# Altium PCB FluxCapacitor.pcbdoc
Units mil, origin at the board's own origin, x right, y up, seen from the top; angles counter-clockwise.
Board outline 985 x 1270 mil, 2 copper layers (Top Layer, Bottom Layer); 30 components, 21 nets, 70 pads, 21 vias.
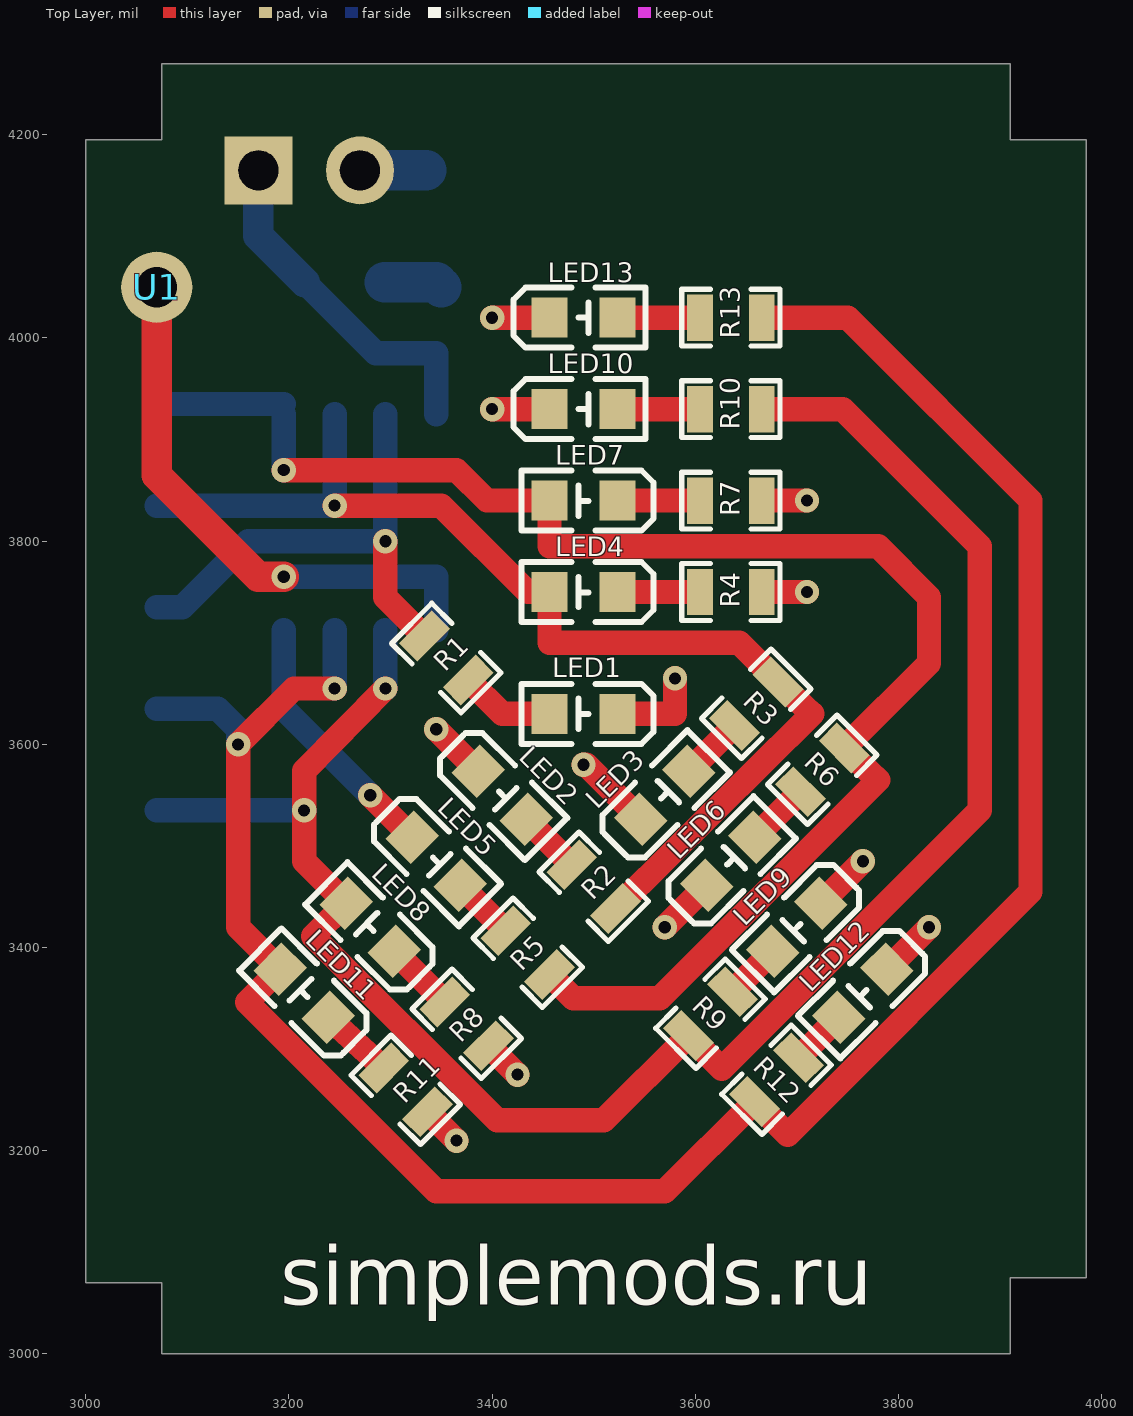
[diagram p0: Top Layer view]
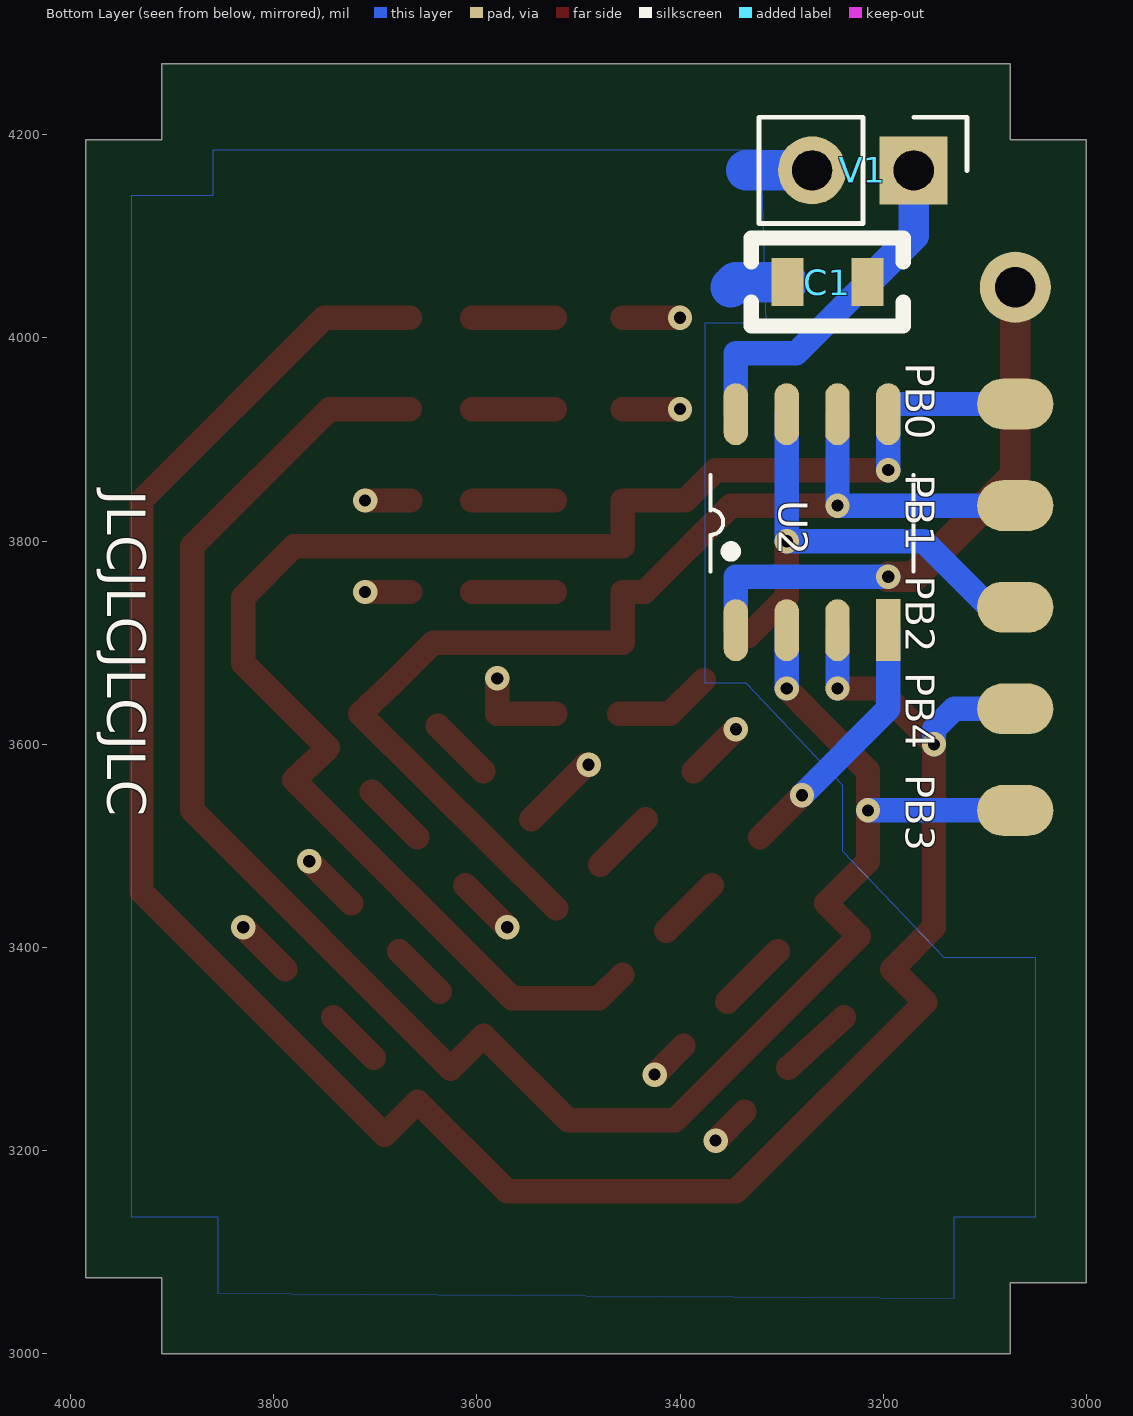
[diagram p1: Bottom Layer view, seen from below]

## Layer stack, top to bottom
Top Solder: solder mask 0.4, Solder Resist, Dk 3.5
Top Layer: signal copper 1.4
Dielectric 1: dielectric 12.6, FR-4, Dk 4.8
Bottom Layer: signal copper 1.4
Bottom Solder: solder mask 0.4, Solder Resist, Dk 3.5

## Board outline
3075,4195 3000,4195 3000,3070 3075,3070 3075,3000 3910,3000 3910,3075 3985,3075 3985,4195 3910,4195 3910,4270 3075,4270

## Design rules (kind name [scope] priority, off if disabled: settings)
AssemblyTestPointUsage [All] p0: scope1count=1 scope1_0_kind=Board scope1_0_value=Board scope2count=1 scope2_0_kind=Board scope2_0_value=Board commentlength=0
AssemblyTestpoint [All] p0: scope1count=1 scope1_0_kind=Board scope1_0_value=Board scope2count=1 scope2_0_kind=Board scope2_0_value=Board commentlength=0
Clearance [All] p0: scope1count=1 scope1_0_kind=Board scope1_0_value=Board scope2count=1 scope2_0_kind=Board scope2_0_value=Board commentlength=0 gap=10
Clearance [All] p1: gap=10 ignorepadtopadclearanceinfootprint=FALSE except(0: Arc-Hole Track-Hole SMDPad-Hole THPad-Hole Via-Hole Fill-Hole Poly-Hole Region-Hole Text-Hole)
ComponentClearance [All] p0: scope1count=1 scope1_0_kind=Board scope1_0_value=Board scope2count=1 scope2_0_kind=Board scope2_0_value=Board commentlength=0 gap=10 collisioncheckmode=3
DiffPairsRouting [All] p0: scope1count=1 scope1_0_kind=Board scope1_0_value=Board scope2count=1 scope2_0_kind=Board scope2_0_value=Board commentlength=0
FabricationTestPointUsage [All] p0: scope1count=1 scope1_0_kind=Board scope1_0_value=Board scope2count=1 scope2_0_kind=Board scope2_0_value=Board commentlength=0 valid=0 allowmultiple=FALSE
FabricationTestpoint [All] p0: scope1count=1 scope1_0_kind=Board scope1_0_value=Board scope2count=1 scope2_0_kind=Board scope2_0_value=Board commentlength=0 side=3 testpointundercomponent=TRUE minsize=40 maxsize=100 preferedsize=60 minholesize=0 maxholesize=40 preferedholesize=32 testpointgrid=1
FanoutControl Fanout_BGA [All] p0 off: scope1count=1 scope1_0_kind=Board scope1_0_value=Board scope2count=1 scope2_0_kind=Board scope2_0_value=Board commentlength=69 // Protel DXP Scope 1 Expression Was: IsBGA   Fanout_BGA (Default Rule)
FanoutControl Fanout_LCC [All] p0 off: scope1count=1 scope1_0_kind=Board scope1_0_value=Board scope2count=1 scope2_0_kind=Board scope2_0_value=Board commentlength=69 // Protel DXP Scope 1 Expression Was: IsLCC   Fanout_LCC (Default Rule)
FanoutControl Fanout_SOIC [All] p0 off: scope1count=1 scope1_0_kind=Board scope1_0_value=Board scope2count=1 scope2_0_kind=Board scope2_0_value=Board commentlength=71 // Protel DXP Scope 1 Expression Was: IsSOIC   Fanout_SOIC (Default Rule)
FanoutControl Fanout_Small [All] p0 off: scope1count=1 scope1_0_kind=Board scope1_0_value=Board scope2count=1 scope2_0_kind=Board scope2_0_value=Board commentlength=84 // Protel DXP Scope 1 Expression Was: (CompPinCount < 5)   Fanout_Small (Default Rule)
FanoutControl Fanout_Default [All] p0: scope1count=1 scope1_0_kind=Board scope1_0_value=Board scope2count=1 scope2_0_kind=Board scope2_0_value=Board commentlength=30 // Fanout_Default (Default Rule)
Height [All] p0: scope1count=1 scope1_0_kind=Board scope1_0_value=Board scope2count=1 scope2_0_kind=Board scope2_0_value=Board commentlength=0
HoleSize [All] p0: scope1count=1 scope1_0_kind=Board scope1_0_value=Board scope2count=1 scope2_0_kind=Board scope2_0_value=Board commentlength=0 absolutevalues=TRUE maxlimit=100 minlimit=1 maxpercent=80.000 minpercent=20.000
HoleToHoleClearance [All] p0: scope1count=1 scope1_0_kind=Board scope1_0_value=Board scope2count=1 scope2_0_kind=Board scope2_0_value=Board commentlength=0
LayerPairs [All] p0: scope1count=1 scope1_0_kind=Board scope1_0_value=Board scope2count=1 scope2_0_kind=Board scope2_0_value=Board commentlength=0 enforce=TRUE
MinimumSolderMaskSliver [All] p0: scope1count=1 scope1_0_kind=Board scope1_0_value=Board scope2count=1 scope2_0_kind=Board scope2_0_value=Board commentlength=0
NetAntennae [All] p0: scope1count=1 scope1_0_kind=Board scope1_0_value=Board scope2count=1 scope2_0_kind=Board scope2_0_value=Board commentlength=0
PasteMaskExpansion [All] p0: scope1count=1 scope1_0_kind=Board scope1_0_value=Board scope2count=1 scope2_0_kind=Board scope2_0_value=Board commentlength=0 expansion=0
PlaneClearance [All] p0: scope1count=1 scope1_0_kind=Board scope1_0_value=Board scope2count=1 scope2_0_kind=Board scope2_0_value=Board commentlength=0 clearance=20
PlaneConnect [All] p0: scope1count=1 scope1_0_kind=Board scope1_0_value=Board scope2count=1 scope2_0_kind=Board scope2_0_value=Board commentlength=0 planeconnectstyle=Relief reliefexpansion=20 reliefentries=4 reliefconductorwidth=10 reliefairgap=10
PolygonConnect [All] p0: scope1count=1 scope1_0_kind=Board scope1_0_value=Board scope2count=1 scope2_0_kind=Board scope2_0_value=Board commentlength=0 connectstyle=Relief reliefconductorwidth=10 reliefentries=4 polygonreliefangle="90 Angle"
PolygonConnect [All] p1: connectstyle=Relief reliefconductorwidth=10 reliefentries=4 polygonreliefangle="90 Angle" airgapwidth=10
RoutingCorners [All] p0: scope1count=1 scope1_0_kind=Board scope1_0_value=Board scope2count=1 scope2_0_kind=Board scope2_0_value=Board commentlength=0 cornerstyle=45-Degree minsetback=100 maxsetback=100
RoutingLayers [All] p0: scope1count=1 scope1_0_kind=Board scope1_0_value=Board scope2count=1 scope2_0_kind=Board scope2_0_value=Board commentlength=0 top layer=Automatic bottom layer=Automatic
RoutingPriority [All] p0: scope1count=1 scope1_0_kind=Board scope1_0_value=Board scope2count=1 scope2_0_kind=Board scope2_0_value=Board commentlength=0
RoutingTopology [All] p0: scope1count=1 scope1_0_kind=Board scope1_0_value=Board scope2count=1 scope2_0_kind=Board scope2_0_value=Board commentlength=0 topology=Shortest
RoutingVias [All] p0: scope1count=1 scope1_0_kind=Board scope1_0_value=Board scope2count=1 scope2_0_kind=Board scope2_0_value=Board commentlength=0 holewidth=28 width=50 viastyle="Through Hole" minholewidth=28 minwidth=50 maxholewidth=28 maxwidth=50
RoutingVias [All] p1: holewidth=28 width=50 viastyle="Through Hole" minholewidth=28 minwidth=50 maxholewidth=28 maxwidth=50
ShortCircuit [All] p0: scope1count=1 scope1_0_kind=Board scope1_0_value=Board scope2count=1 scope2_0_kind=Board scope2_0_value=Board commentlength=0 allowed=FALSE
SilkToBoardRegionClearance [All] p0: scope1count=1 scope1_0_kind=Board scope1_0_value=Board scope2count=1 scope2_0_kind=Board scope2_0_value=Board commentlength=0
SilkToSilkClearance [All] p0: scope1count=1 scope1_0_kind=Board scope1_0_value=Board scope2count=1 scope2_0_kind=Board scope2_0_value=Board commentlength=0
SilkToSolderMaskClearance [All] p0 off: scope1count=1 scope1_0_kind=Board scope1_0_value=Board scope2count=1 scope2_0_kind=Board scope2_0_value=Board commentlength=44 // Protel DXP Scope 1 Expression Was: IsPad
SolderMaskExpansion [All] p0: scope1count=1 scope1_0_kind=Board scope1_0_value=Board scope2count=1 scope2_0_kind=Board scope2_0_value=Board commentlength=0 expansion=4
SolderMaskExpansion [All] p1: expansion=4 istentingtop=FALSE
UnRoutedNet [All] p0: scope1count=1 scope1_0_kind=Board scope1_0_value=Board scope2count=1 scope2_0_kind=Board scope2_0_value=Board commentlength=0
UnpouredPolygon [All] p0: scope1count=1 scope1_0_kind=Board scope1_0_value=Board scope2count=1 scope2_0_kind=Board scope2_0_value=Board commentlength=0
Width [All] p0: scope1count=1 scope1_0_kind=Board scope1_0_value=Board scope2count=1 scope2_0_kind=Board scope2_0_value=Board commentlength=0 maxlimit=10 minlimit=10 preferedwidth=10
Width [All] p1: maxlimit=10 minlimit=10 preferedwidth=10
30 further rules are at their usual default settings.

## Components (designator, comment, footprint, x,y, rotation, side; value= is the part's Value field where it differs from the comment)
C1 "150u" fe09dbbba525426883dd2f75b8a5dadf 3255,4055 r0 bottom
LED1 "204-10SURD/S530-A3" LED0603-FD 3490,3630 r0 top
LED2 "204-10SURD/S530-A3" c88aef745d464b878583123803bd6a02 3410,3550 r135 top
LED3 "204-10SURD/S530-A3" c88aef745d464b878583123803bd6a02 3570,3550 r225 top
LED4 "204-10SURD/S530-A3" LED0603-FD 3490,3750 r0 top
LED5 "204-10SURD/S530-A3" c88aef745d464b878583123803bd6a02 3345,3485 r135 top
LED6 "204-10SURD/S530-A3" c88aef745d464b878583123803bd6a02 3635,3485 r225 top
LED7 "204-10SURD/S530-A3" LED0603-FD 3490,3840 r0 top
LED8 "204-10SURD/S530-A3" c88aef745d464b878583123803bd6a02 3280,3420 r315 top
LED9 "204-10SURD/S530-A3" c88aef745d464b878583123803bd6a02 3700,3420 r45 top
LED10 "204-10SURD/S530-A3" c88aef745d464b878583123803bd6a02 3490,3930 r180 top
LED11 "204-10SURD/S530-A3" c88aef745d464b878583123803bd6a02 3215,3355 r315 top
LED12 "204-10SURD/S530-A3" c88aef745d464b878583123803bd6a02 3765,3355 r45 top
LED13 "204-10SURD/S530-A3" c88aef745d464b878583123803bd6a02 3490,4020 r180 top
R1 "220" 9b25a176a8c64f669440bb485681adbd 3355,3685 r315 top
R2 "220" 9b25a176a8c64f669440bb485681adbd 3500,3460 r315 top
R3 "220" 9b25a176a8c64f669440bb485681adbd 3660,3640 r225 top
R4 "220" SM0603_RESISTOR 3635,3750 r0 top
R5 "220" 9b25a176a8c64f669440bb485681adbd 3435,3395 r135 top
R6 "220" 9b25a176a8c64f669440bb485681adbd 3725,3575 r225 top
R7 "220" SM0603_RESISTOR 3635,3840 r0 top
R8 "220" 9b25a176a8c64f669440bb485681adbd 3375,3325 r315 top
R9 "220" 9b25a176a8c64f669440bb485681adbd 3615,3335 r45 top
R10 "220" SM0603_RESISTOR 3635,3930 r0 top
R11 "220" 9b25a176a8c64f669440bb485681adbd 3315,3260 r315 top
R12 "220" 9b25a176a8c64f669440bb485681adbd 3680,3270 r45 top
R13 "220" SM0603_RESISTOR 3635,4020 r0 top
U1 "1X01-CLEANBIG" 1X01-CLEANBIG 3070,4050 r0 top
U2 "ATtiny13A" 5a076db198c24afdb4a9b3188ef892e5 3270,3820 r180 bottom
V1 "Voltage_Source_VDC" 24ec65ffa466416b8291d859e8b2e801 3170,4165 r90 bottom

## Footprints (in the part's own frame and the unit in brackets; to place one, negate y for a bottom-side part, rotate by r counter-clockwise, add the part's x,y. Pads: shape width x height; smd on the part's side, far side on the other; paste and mask are expansions set on the pad)
1X01-CLEANBIG [mil]
  round 70 hole 40 mask+0: 1(0,0)
5a076db198c24afdb4a9b3188ef892e5 [mil]
  oval 24x61 smd mask+0: 2(-25,-107.6) 3(25,-107.6) 5(75,105) 6(25,105) 7(-25,105) 8(-75,105) PB_5(-75,-107.6)
  rect 24x61 smd mask+0: 4(75,-107.6)
  silkscreen extent -100,-50 100,45
9b25a176a8c64f669440bb485681adbd [mil]
  rect 25.4x45.7 smd mask+0: 1(-30.5,0) 2(30.5,0)
  silkscreen extent -48,-28 48,28
24ec65ffa466416b8291d859e8b2e801 [mil]
  rect 66.93x66.93 hole 39.36 mask+0: 1(0,0)
  round 66.93 hole 39.36 mask+0: 2(0,100)
  silkscreen extent -52,-52 52,152
c88aef745d464b878583123803bd6a02 [mm]
  rect 0.9x1 smd mask+0: 1(-0.85,0) 2(0.85,0)
  silkscreen extent -1.55,-0.75 1.75,0.75
fe09dbbba525426883dd2f75b8a5dadf [mil]
  rect 31.5x47.2 smd mask+0: 1(-39.4,0) 2(39.4,0)
  silkscreen extent -75,-43 75,43
LED0603-FD [mm]
  rect 0.9x1 smd mask+0: 1(-0.85,0) 2(0.85,0)
  silkscreen extent -1.55,-0.75 1.75,0.75
SM0603_RESISTOR [mil]
  rect 25.4x45.7 smd mask+0: 1(-30.5,0) 2(30.5,0)
  silkscreen extent -48,-28 48,28

## Free pads (board coordinates)
  oval 75x50 smd far side mask+0: 1(3070,3935) 2(3070,3835) 3(3070,3735) 5(3070,3535) 5(3070,3635)

## Via types
v1: diameter 24, hole 12, Top Layer to Bottom Layer, 21 vias

## Nets (pads, with @x,y where several pads share a name; then routed paths per layer and width w, separated by ;. In a path a pad name is that pad's centre, name@x,y a point inside that pad or via, vN(x,y) a via of type N, cw(c..) or ccw(c..) an arc to the next point about the centre after c; other vN are vias at no path point)
GND: C1.2 LED1.2 LED2.2 LED3.2 LED5.2 LED6.2 LED9.2 LED10.2 LED12.2 LED13.2 R4.2 R7.2 R8.2 R11.2 U2.4 V1.2 | length 1065.6
  Top Layer w24: v1(3280,3550) LED5.2 ; R11.2 v1(3365,3210) ; v1(3345,3615) LED2.2 ; R8.2 v1(3425,3275) ; v1(3400,3930) LED10.2 ; v1(3400,4020) LED13.2 ; v1(3490,3580) 3492.67,3580 LED3.2 ; LED1.2@3523,3630 3580,3630 v1(3580,3665) ; v1(3570,3420) LED6.2 ; R4.2 v1(3710,3750) ; R7.2 v1(3710,3840) ; LED9.2 v1(3765,3485) ; LED12.2 v1(3830,3420)
  Bottom Layer w24: U2.4 3195,3635 v1(3280,3550)
  Bottom Layer w40: V1.2 3335,4165 ; C1.2 3345,4055 3350,4050
LED2_1:  | length 63.2
  Top Layer w24: 3433.7,3526.3 3478.4,3481.6
LED3_1: R3.2 | length 63.3
  Top Layer w24: 3593.66,3573.66 R3.2
LED4_2: LED4.2 | length 81
  Top Layer w24: LED4.2 3604.5,3750
LED5_1: R5.2 | length 63.3
  Top Layer w24: 3368.7,3461.3 R5.2
LED6_1: R6.2 | length 63.3
  Top Layer w24: 3658.66,3508.66 R6.2
LED7_2: LED7.2 | length 81
  Top Layer w24: LED7.2 3604.5,3840
LED8_2: LED8.2 | length 70.4
  Top Layer w24: LED8.2 3353.44,3346.57
LED9_1: R9.2 | length 56.2
  Top Layer w24: R9.2 3676.34,3396.34
LED10_1:  | length 81
  Top Layer w24: 3523.46,3930 3604.5,3930
LED11_2: LED11.2 | length 74
  Top Layer w24: LED11.2 3293.4,3281.6
LED12_1: R12.2 | length 56.2
  Top Layer w24: R12.2 3741.34,3331.34
PB0_1: pad.1 | length 1544.3
  Top Layer w24: v1(3195,3870) 3365,3870 3395,3840 3456.5,3840 3456.5,3795 3780,3795 3830,3745 3830,3680 3746.57,3596.57 ; 3456.6,3373.4 3480,3350 3565,3350 3780,3565 3746.6,3596.6
  Bottom Layer w24: pad.1 3195,3935 ; v1(3195,3870) 3195,3925
PB1_1: pad.2 R2.2 U2.6 | length 1120.9
  Top Layer w24: v1(3245,3835) 3350,3835 3435,3750 3456.5,3750 3456.5,3700 3643.14,3700 3681.57,3661.57 ; R2.2 3715,3630 3681.6,3661.6
  Bottom Layer w24: pad.2 v1(3245,3835) U2.6
PB2_1: pad.3 U2.7 | length 486.2
  Top Layer w24: v1(3295,3800) 3295,3745 3333.4,3706.6
  Bottom Layer w24: pad.3 3095,3735 3160,3800 v1(3295,3800) U2.7
PB3_2: pad.5@3070,3535 R10.2 U2.2 | length 1924
  Top Layer w24: v1(3295,3655) 3215,3574 3215,3485 3256.3,3443.7 3223.8,3411.2 3405,3230 3510,3230 3593.4,3313.4 3625.9,3280.9 3880,3535 3880,3795 3745,3930 R10.2@3666,3930
  Bottom Layer w24: pad.5@3070,3535 v1(3215,3535) ; v1(3295,3655) U2.2
PB4_1: pad.5@3070,3635 R13.2 U2.3 | length 2283.8
  Top Layer w24: v1(3245,3655) 3205,3655 v1(3150,3600) 3150,3420 3191.3,3378.7 3158.8,3346.2 3345,3160 3570,3160 3658.4,3248.4 3690.9,3215.9 3930,3455 3930,3840 3750,4020 R13.2@3666,4020
  Bottom Layer w24: pad.5@3070,3635 3130,3635 3150,3615 v1(3150,3600) ; v1(3245,3655) U2.3
R1_2: R1.2 | length 97.3
  Top Layer w24: R1.2 3410,3630 3460,3630
R13_1:  | length 81
  Top Layer w24: 3523.46,4020 3604.5,4020
RESET: U2.PB_5 | length 554
  Top Layer w30: 3070,4050 3070,3865 3170,3765 v1(3195,3765)
  Bottom Layer w24: v1(3195,3765) 3345,3765 U2.PB_5
VCC: U2.8 | length 347.3
  Bottom Layer w24: 3215.6,4055 3285.6,3985 3345,3985 U2.8
  Bottom Layer w30: 3170,4165 3170,4100.6 3215.6,4055
pads on no net: C1.1 LED1.1 LED2.1 LED3.1 LED4.1 LED5.1 LED6.1 LED7.1 LED8.1 LED9.1 LED10.1 LED11.1 LED12.1 LED13.1 R1.1 R2.1 R3.1 R4.1 R5.1 R6.1 R7.1 R8.1 R9.1 R10.1 R11.1 R12.1 R13.1 U1.1 U2.5 V1.1

## Polygon pours and split planes (outlines as drawn)
GND on Bottom Layer "Bottom Layer-GND" (solid, remove dead copper, pour order 0): 3320,4185 3860,4185 3860,4140 3940,4140 3940,3135 3855,3135 3855,3060 3130,3055 3130,3135 3050,3135 3050,3390 3140,3390 3240,3495 3240,3560 3335,3660 3375,3660 3375,4015 3315,4015

## Silkscreen, mask and mechanical layers (free items; w line width, h text height)
Top Overlay:
  text "simplemods.ru" at 3191.56,3048.24 h57.42
Bottom Overlay:
  text "PB0" at 3178.02,3975.77 h28.71 r90
  text "PB1" at 3178.02,3865.77 h28.71 r90
  text "JLCJLCJLCJLC" at 3963.65,3850.08 h37.68 r90
  text "PB2" at 3178.02,3765.77 h28.71 r90
  text "PB4" at 3178.02,3670.77 h28.71 r90
  text "PB3" at 3178.02,3570.77 h28.71 r90
Mechanical 1:
  the board outline again, w10

## Text inside footprints (layer, text, board x,y; h text height)
V1: Keep-Out Layer "P1" at 3189.76,4188.65 h37.68